# Altium PCB LPCB279R0.PcbDoc (part 2 of 3)
Units mm, origin at the board's own origin, x right, y up, seen from the top; angles counter-clockwise.
Board outline 96 x 109 mm, 2 copper layers (Top Layer, Bottom Layer); 115 components, 90 nets, 384 pads, 812 vias.
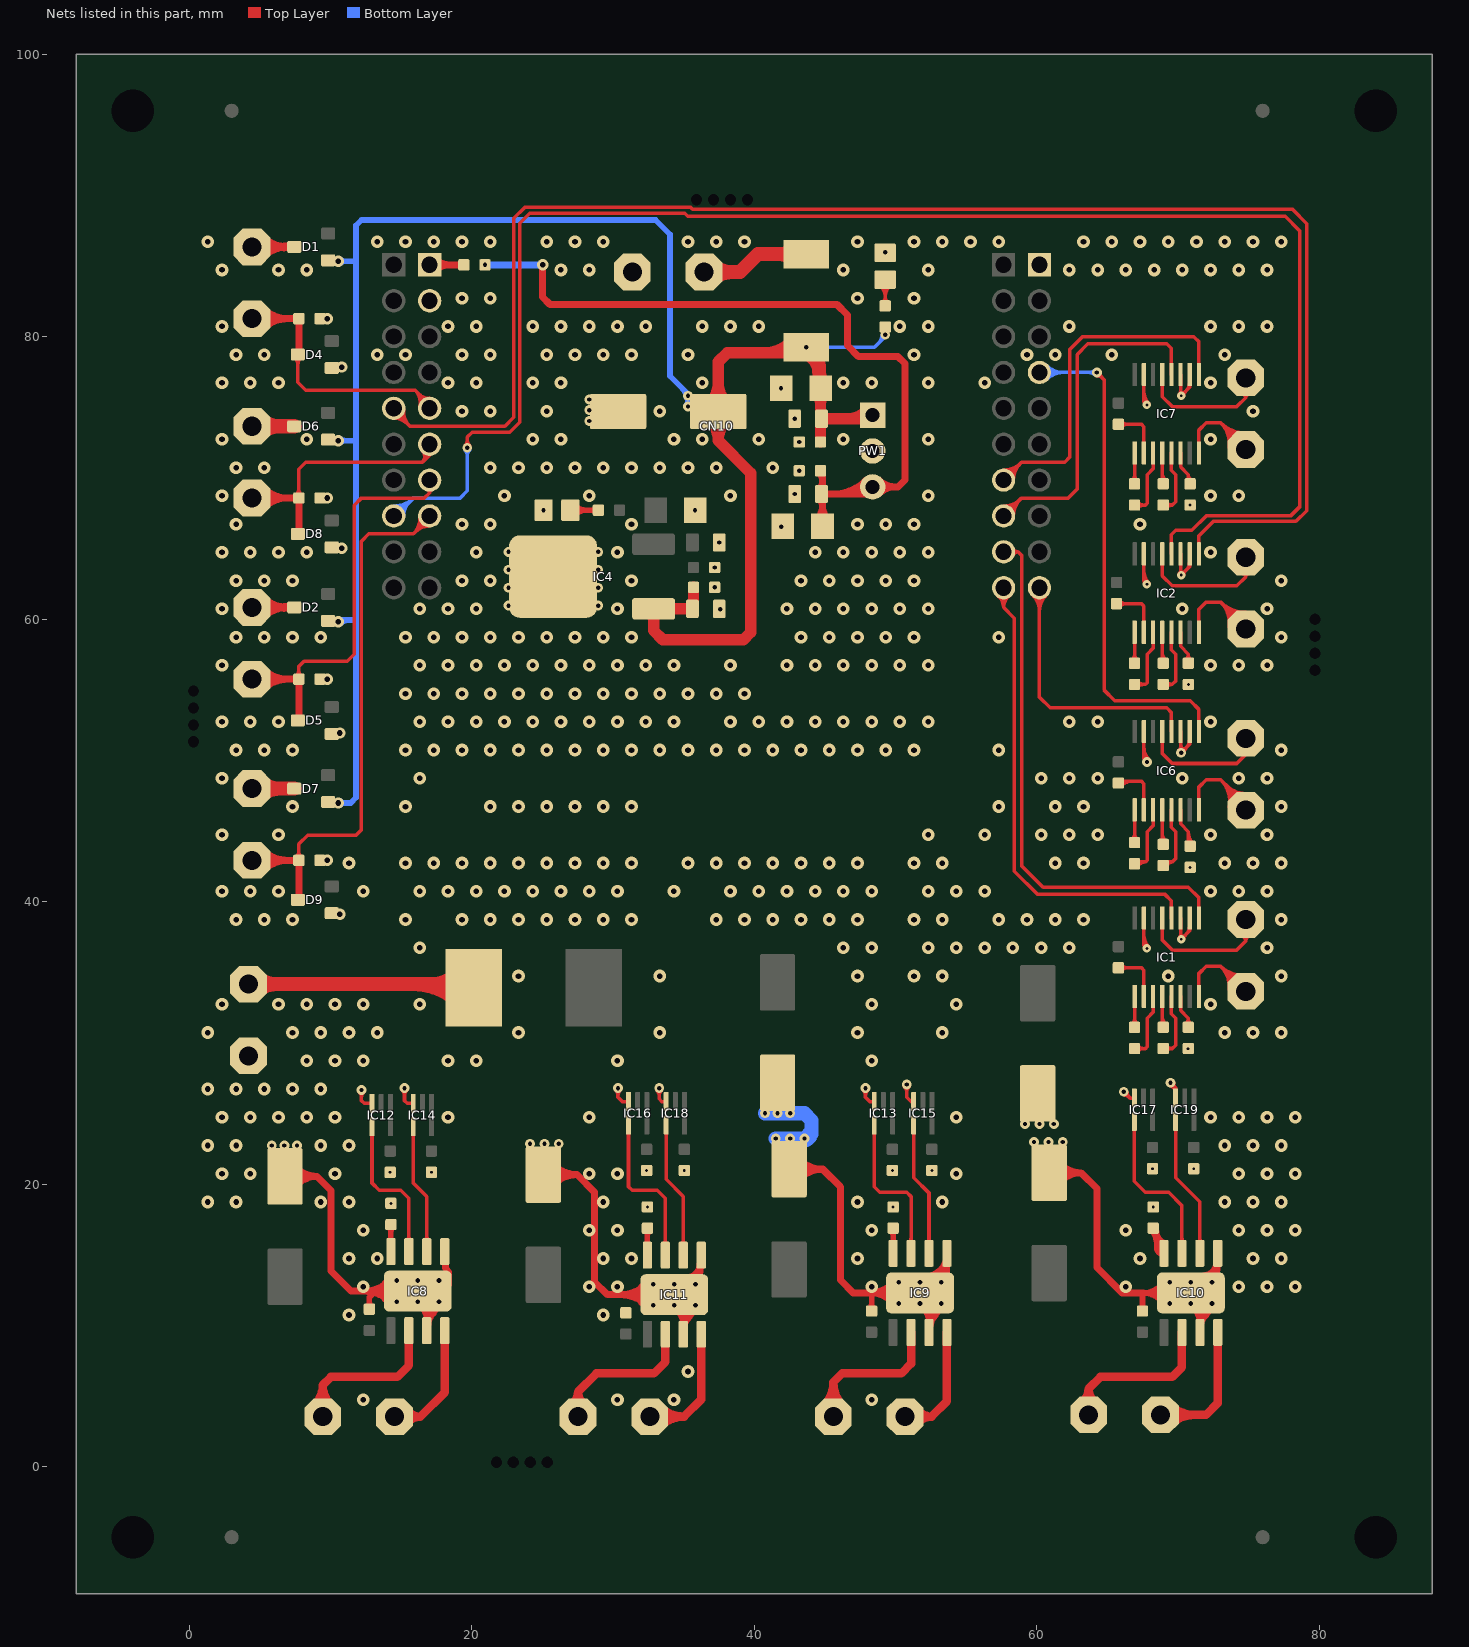
[diagram p2: the nets of this part, all layers, seen from the top]

## Via types
v1: diameter 0.9, hole 0.4, Top Layer to Bottom Layer, tented both sides, 631 vias
v2: diameter 0.7, hole 0.3, Top Layer to Bottom Layer, tented both sides, 111 vias
v3: diameter 0.6, hole 0.2, Top Layer to Bottom Layer, tented both sides, 33 vias
v4: diameter 0.7, hole 0.33, Top Layer to Bottom Layer, tented bottom, 24 vias
v5: diameter 0.8, hole 0.4, Top Layer to Bottom Layer, tented both sides, 13 vias

## Nets (pads, with @x,y where several pads share a name; then routed paths per layer and width w, separated by ;. In a path a pad name is that pad's centre, name@x,y a point inside that pad or via, vN(x,y) a via of type N, cw(c..) or ccw(c..) an arc to the next point about the centre after c; other vN are vias at no path point) (continued)
DGND: C6.2 C7.2 C8.2 C9.2 C10.2 C11.2 C12.2 C13.2 C14.2 C15.2 C16.2 C18.2 C19.2 C26.2 C27.2 C28.2 C29.2 C30.2 C31.2 C32.2 C33.2 C34.2 C35.2 C36.2 C37.2 C38.2 C39.2 CE1.2 CE2.2 CE3.2 CE4.2 CE5.2 CE6.2 CE7.2 CN3.2 CN10.J2_1 CN10.J3_2 CN15.2 D4.1 D5.1 D8.1 D9.1 IC1.10 IC1.11 IC1.15 IC2.10 IC2.11 IC2.15 IC3.K IC4.4 IC5.K IC6.10 IC6.11 IC6.15 IC7.10 IC7.11 IC7.15 IC8.1 IC8.7 IC8.PAD IC9.1 IC9.7 IC9.PAD IC10.1 IC10.7 IC10.PAD IC11.1 IC11.7 IC11.PAD IC12.3 IC13.3 IC14.3 IC15.3 IC16.3 IC17.3 IC18.3 IC19.3 PW1.2 R1.1 R2.1 R3.1 R4.1 R8.1 R9.1 R10.1 R11.1 | length 290.6
  Top Layer w0.25: v2@12.033,26.511 cw(c11.649,26.127) 12.192,26.127 cw(c12.735,26.127) v2@12.351,26.511 ; v2(12.192,26.67) 12.192,25.908 12.383,25.717 IC12.3@12.939,25.717 ; v2@15.081,26.638 cw(c14.697,26.254) 15.24,26.254 cw(c15.783,26.254) v2@15.399,26.638 ; v2(15.24,26.797) 15.24,25.908 15.431,25.717 IC14.3@15.86,25.717 ; v2@30.194,26.638 cw(c29.81,26.254) 30.353,26.254 cw(c30.896,26.254) v2@30.512,26.638 ; v2(30.353,26.797) 30.353,26.162 30.671,25.844 IC16.3@31.1,25.844 ; v2@33.115,26.638 cw(c32.731,26.254) 33.274,26.254 cw(c33.817,26.254) v2@33.433,26.638 ; v2(33.274,26.797) 33.274,26.035 33.465,25.844 IC18.3@33.767,25.844 ; v2@47.72,26.638 cw(c47.336,26.254) 47.879,26.254 cw(c48.422,26.254) v2@48.038,26.638 ; v2(47.879,26.797) 47.879,26.162 48.197,25.844 IC13.3@48.499,25.844 ; v2@50.641,26.892 cw(c50.257,26.508) 50.8,26.508 cw(c51.343,26.508) v2@50.959,26.892 ; v2(50.8,27.051) 50.8,26.162 51.118,25.844 IC15.3@51.293,25.844 ; v2@66.167,26.318 cw(c66.167,25.775) 66.551,26.159 cw(c66.935,26.543) v2@66.392,26.543 ; v2(66.167,26.543) 66.612,26.098 IC17.3@66.914,26.098 ; 67.59,37.021 ccw(c68.136,37.021) v3@67.75,36.635 ; 67.59,37.625 ccw(c68.74,37.625) v3@67.927,36.812 ; IC1.15@67.59,38.843 67.59,36.931 ; 67.59,50.35 ccw(c68.257,50.35) v2@67.785,49.878 ; 67.59,50.953 ccw(c68.86,50.953) v2@67.962,50.055 ; IC6.15@67.59,52.051 67.59,50.139 v2@67.818,49.911 ; 67.59,62.802 ccw(c68.136,62.802) v3@67.75,62.416 ; 67.59,63.406 ccw(c68.74,63.406) v3@67.927,62.593 ; IC2.15@67.59,64.624 67.59,62.712 ; 67.59,75.502 ccw(c68.136,75.502) v3@67.75,75.116 ; 67.59,76.106 ccw(c68.74,76.106) v3@67.927,75.293 ; IC7.15@67.59,77.324 67.59,75.412 ; v3@67.636,36.741 ccw(c67.457,36.798) 67.59,36.931 ; v3@67.636,62.522 ccw(c67.457,62.579) 67.59,62.712 ; v3@67.636,75.222 ccw(c67.457,75.279) 67.59,75.412 ; v3@67.785,36.862 cw(c67.76,37.101) 67.59,36.931 ; v3@67.785,62.643 cw(c67.76,62.882) 67.59,62.712 ; v3@67.785,75.343 cw(c67.76,75.582) 67.59,75.412 ; v3@67.818,36.703 67.59,36.931 ; v3@67.818,62.484 67.59,62.712 ; v3@67.818,75.184 67.59,75.412 ; v2@69.446,26.954 cw(c69.401,26.522) IC19.3@69.777,26.739 ; v2(69.469,27.178) 69.835,26.812 ; v2@69.477,26.953 cw(c69.494,26.471) 69.835,26.812 ; v2@69.598,27.049 cw(c69.148,26.598) IC19.3@69.785,26.598 ; v2@69.686,27.12 ccw(c70.055,27.021) 69.724,26.83 ; v2@69.694,27.17 ccw(c70.176,27.153) 69.835,26.812 ; IC19.3@69.835,26.098 69.835,26.812 ; v2@70.072,50.705 ccw(c69.787,50.99) 70.19,50.99 ; v3@70.107,37.462 ccw(c69.907,37.662) 70.19,37.662 ; v3@70.107,63.243 ccw(c69.907,63.443) 70.19,63.443 ; v3@70.107,75.943 ccw(c69.907,76.143) 70.19,76.143 ; 70.19,37.859 ccw(c70.752,37.859) v3@70.355,37.462 ; IC1.11@70.19,38.843 v3@70.19,37.379 ; v2@70.19,50.587 IC6.11@70.19,52.051 ; 70.19,51.188 ccw(c70.873,51.188) v2@70.39,50.705 ; v3@70.19,63.16 IC2.11@70.19,64.624 ; 70.19,63.64 ccw(c70.752,63.64) v3@70.355,63.243 ; v3@70.19,75.86 IC7.11@70.19,77.324 ; 70.19,76.34 ccw(c70.752,76.34) v3@70.355,75.943 ; v3(70.231,37.338) v3@70.19,37.379 ; v3@70.231,37.513 ccw(c70.231,37.935) 70.53,37.637 ccw(c70.828,37.338) v3@70.406,37.338 ; v2@70.231,50.771 ccw(c70.231,51.314) 70.615,50.93 ccw(c70.999,50.546) v2@70.456,50.546 ; v3@70.231,63.294 ccw(c70.231,63.716) 70.53,63.418 ccw(c70.828,63.119) v3@70.406,63.119 ; v3@70.231,75.994 ccw(c70.231,76.416) 70.53,76.118 ccw(c70.828,75.819) v3@70.406,75.819 ; v2@70.272,50.587 70.84,51.155 IC6.10@70.84,52.051 ; v3@70.272,63.16 70.84,63.728 IC2.10@70.84,64.624 ; v3@70.272,75.86 70.84,76.428 IC7.10@70.84,77.324 ; 70.641,37.748 ccw(c70.221,38.168) IC1.10@70.815,38.168 ; 70.641,50.956 ccw(c70.221,51.376) IC6.10@70.815,51.376 ; 70.641,63.529 ccw(c70.221,63.949) IC2.10@70.815,63.949 ; 70.641,76.229 ccw(c70.221,76.649) IC7.10@70.815,76.649 ; IC1.10@70.84,38.843 70.84,37.947 70.272,37.379 v3@70.19,37.379
  Top Layer w0.4: C28.2@12.612,11.286 ccw(c12.27,11.628) 12.753,11.628 ccw(c13.236,11.628) C28.2@12.894,11.286 ; C28.2@12.753,11.145 12.753,11.991 13.149,12.387 ; IC8.PAD@14.113,12.984 cw(c13.149,13.464) 13.149,12.387 ; IC8.PAD@14.146,11.808 ccw(c13.149,11.239) 13.149,12.387 ; IC8.PAD@16.179,11.927 cw(c16.185,11.428) IC8.PAD@16.617,11.678 ; IC8.PAD@16.222,12.467 16.476,12.467 16.892,12.883 IC8.PAD@16.892,13.391 ; IC8.PAD@16.248,11.543 cw(c14.694,9.989) IC8.7@16.892,9.989 ; IC8.PAD@16.327,11.638 ccw(c16.709,11.536) IC8.PAD@16.366,11.338 ; IC8.PAD@16.531,11.826 cw(c15.659,10.954) 16.892,10.954 ; IC8.7@16.729,10.34 ccw(c16.334,10.735) 16.892,10.735 ; IC8.7@16.817,9.627 16.892,9.702 16.892,11.971 16.476,12.387 IC8.PAD@16.222,12.387 ; IC8.7@16.892,9.692 cw(c18.898,9.692) IC8.PAD@17.81,11.377 ; IC8.7@16.892,10.426 cw(c18.424,10.426) IC8.PAD@17.593,11.713 ; 17.179,10.679 ccw(c16.16,11.601) IC8.PAD@17.532,11.67 ; IC8.PAD@17.226,11.308 cw(c17.723,10.858) IC8.PAD@17.689,11.527 ; IC8.1@18.087,15.227 18.087,14.081 IC8.PAD@18.392,13.776 ; IC8.1@18.206,14.563 ccw(c18.936,14.32) IC8.PAD@18.392,13.776 ; IC11.PAD@34.343,12.673 ccw(c34.343,13.88) IC11.PAD@35.197,13.027 ; IC11.PAD@34.343,13.073 ccw(c34.343,15.246) 35.879,13.709 ; IC11.PAD@34.409,11.289 cw(c33.036,9.916) IC11.7@34.978,9.916 ; IC11.PAD@34.488,11.384 ccw(c34.87,11.282) IC11.PAD@34.527,11.084 ; IC11.7@34.978,9.355 cw(c37.047,9.355) IC11.PAD@35.954,11.112 ; IC11.7@34.978,9.373 34.978,11.538 IC11.PAD@34.343,12.173 ; IC11.7@34.978,10.076 cw(c36.599,10.076) IC11.PAD@35.742,11.451 ; IC11.PAD@35.004,12.834 cw(c35.822,12.017) IC11.PAD@35.849,13.173 ; IC11.PAD@35.293,13.423 ccw(c35.293,14.147) 35.805,13.635 ; 35.326,10.441 ccw(c34.33,11.373) IC11.PAD@35.693,11.418 ; IC11.PAD@35.374,11.058 cw(c35.871,10.594) IC11.PAD@35.848,11.273 ; IC11.PAD@35.606,12.844 cw(c36.326,13.083) IC11.PAD@35.789,13.619 ; IC11.PAD@35.84,12.773 ccw(c35.793,10.723) IC11.PAD@34.343,12.173 ; 35.844,13.674 ccw(c35.169,14.348) IC11.1@36.123,14.348 ; IC11.PAD@35.924,12.743 cw(c36.483,13.248) 35.95,13.78 ; IC11.PAD@35.985,12.97 cw(c37.015,13.311) IC11.1@36.248,14.078 ; IC11.PAD@36.221,13.011 cw(c36.796,13.53) IC11.1@36.248,14.078 ; IC11.1@36.248,14.973 IC11.1@36.248,14.078 ; C29.2@48.172,11.159 ccw(c47.83,11.501) 48.313,11.501 ccw(c48.796,11.501) C29.2@48.454,11.159 ; C29.2@48.313,11.018 48.313,12.3 v1@48.313,12.372 ; 49.063,12.372 cw(c49.063,11.14) IC9.PAD@50.086,11.826 ; 49.155,12.372 ccw(c49.155,13.634) IC9.PAD@50.133,12.837 ; IC9.PAD@49.754,11.604 ccw(c48.313,10.637) v1@48.313,12.372 ; IC9.PAD@49.799,12.596 ccw(c49.369,13.191) IC9.PAD@50.094,13.074 ; IC9.PAD@49.823,13.089 cw(c48.313,14.319) v1@48.313,12.372 ; IC9.PAD@49.847,12.036 cw(c49.371,11.491) IC9.PAD@50.092,11.54 ; IC9.PAD@51.739,11.8 cw(c51.745,11.301) IC9.PAD@52.177,11.551 ; IC9.PAD@51.808,11.416 cw(c50.254,9.862) IC9.7@52.452,9.862 ; IC9.PAD@51.887,11.511 ccw(c52.269,11.409) IC9.PAD@51.926,11.211 ; IC9.PAD@52.091,11.699 cw(c51.219,10.827) 52.452,10.827 ; IC9.7@52.289,10.213 ccw(c51.894,10.608) 52.452,10.608 ; IC9.7@52.377,9.5 52.452,9.575 52.452,11.844 52.036,12.26 51.782,12.26 IC9.PAD@51.742,12.3 51.702,12.34 49.948,12.34 49.916,12.372 v1@48.313,12.372 ; IC9.PAD@52.399,13.515 ccw(c52.017,15.1) IC9.1@53.647,15.1 IC9.PAD@53.647,13.634 ; IC9.7@52.452,9.565 cw(c54.458,9.565) IC9.PAD@53.37,11.25 ; IC9.7@52.452,10.299 cw(c53.984,10.299) IC9.PAD@53.153,11.586 ; IC9.PAD@52.493,13.126 ccw(c52.139,14.592) IC9.1@53.647,14.592 ; IC9.PAD@52.587,12.737 ccw(c52.262,14.084) 53.647,14.084 ; IC9.PAD@52.643,12.321 ccw(c51.962,13.24) IC9.PAD@53.094,13.072 ; IC9.PAD@52.68,12.349 ccw(c52.384,13.576) IC9.PAD@53.647,13.576 ; 52.739,10.552 ccw(c51.72,11.474) IC9.PAD@53.092,11.543 ; IC9.PAD@52.786,11.181 cw(c53.283,10.731) IC9.PAD@53.249,11.4 ; IC9.PAD@52.82,12.865 cw(c53.059,12.428) IC9.PAD@53.2,12.906 ; IC9.PAD@53.002,12.98 cw(c53.62,13.16) IC9.PAD@53.066,13.487 ; IC9.PAD@53.381,13.106 cw(c53.824,13.284) IC9.PAD@53.385,13.471 ; IC9.PAD@53.386,13.092 cw(c54.842,13.514) IC9.1@53.536,14.284 ; C30.2@67.349,11.159 ccw(c67.007,11.501) 67.49,11.501 ccw(c67.973,11.501) C30.2@67.631,11.159 ; C30.2@67.49,11.018 67.49,12.245 67.545,12.3 ; IC10.PAD@68.951,11.575 ccw(c67.545,10.575) 67.545,12.3 ; IC10.PAD@68.951,13.025 cw(c67.545,14.025) 67.545,12.3 ; IC10.PAD@69.008,12.029 cw(c68.544,11.467) IC10.PAD@69.27,11.536 ; IC10.PAD@69.008,12.571 ccw(c68.544,13.133) IC10.PAD@69.27,13.064 ; IC10.PAD@69.276,11.807 ccw(c68.321,11.127) 68.321,12.3 ccw(c68.321,13.473) IC10.PAD@69.276,12.793 ; IC10.PAD@70.985,11.416 cw(c69.612,10.043) IC10.7@71.554,10.043 ; IC10.PAD@71.064,11.511 ccw(c71.446,11.409) IC10.PAD@71.103,11.211 ; IC10.PAD@71.157,12.377 cw(c72.419,11.116) IC10.PAD@72.419,12.9 ; IC10.7@71.554,9.482 cw(c73.623,9.482) IC10.PAD@72.53,11.239 ; IC10.7@71.554,9.5 71.554,11.665 IC10.PAD@70.919,12.3 ; IC10.7@71.554,10.203 cw(c73.175,10.203) IC10.PAD@72.318,11.578 ; IC10.PAD@71.821,13.549 ccw(c71.786,14.472) 72.585,14.01 ccw(c73.133,13.694) IC10.PAD@72.708,13.226 ; IC10.PAD@71.84,13.06 cw(c72.419,12.482) IC10.PAD@72.419,13.3 ; IC10.PAD@71.869,13.55 ccw(c71.869,14.663) 72.656,13.876 ; 71.902,10.568 ccw(c70.906,11.5) IC10.PAD@72.269,11.545 ; IC10.PAD@71.95,11.185 cw(c72.447,10.721) IC10.PAD@72.424,11.4 ; IC10.PAD@72.177,12.987 cw(c72.745,13.135) IC10.PAD@72.33,13.55 ; IC10.PAD@72.306,13.526 ccw(c71.357,14.475) IC10.1@72.699,14.475 ; IC10.PAD@72.502,12.868 cw(c72.977,13.294) IC10.PAD@72.525,13.745 ; IC10.PAD@72.564,13.088 cw(c73.529,13.339) 72.824,14.044 ; IC10.PAD@72.799,13.135 cw(c73.292,13.576) 72.824,14.044 ; IC10.1@72.824,15.1 72.824,14.044 ; 13.149,12.387 IC8.PAD@16.222,12.387 ; IC8.PAD@16.222,12.387 IC8.PAD@16.182,12.427 17.936,12.427 18.392,12.883 IC8.PAD@18.392,13.776 ; IC11.PAD@34.343,12.173 IC11.1@36.248,14.078 ; 67.545,12.3 IC10.PAD@70.919,12.3 ; IC10.PAD@70.919,12.3 71.08,12.3 72.824,14.044 ; IC11.PAD@35.753,13.043 ccw(c35.037,13.99) 36.213,13.827 cw(c35.037,13.99) IC11.PAD@35.753,13.043 ; IC10.PAD@72.331,13.172 ccw(c71.638,14.133) 72.808,13.944 cw(c71.638,14.133) IC10.PAD@72.331,13.172
  Top Layer w0.5: CE2.2@6.784,20.549 9.042,20.549 ; CE2.2@7.525,19.877 cw(c9.042,18.5) 9.042,20.549 ; CE2.2@7.525,21.221 ccw(c9.042,22.598) 9.042,20.549 ; IC8.PAD@13.865,11.878 ccw(c14.386,12.78) IC8.PAD@14.656,11.774 ; IC8.PAD@13.865,12.976 cw(c14.386,12.074) IC8.PAD@14.656,13.08 ; IC8.PAD@14.078,12.313 cw(c13.533,11.369) IC8.PAD@14.585,11.651 ; IC8.PAD@14.078,12.541 ccw(c13.533,13.485) IC8.PAD@14.585,13.203 ; IC8.PAD@14.357,12.427 11.449,12.427 10.033,13.843 10.033,19.558 9.042,20.549 ; IC8.PAD@14.383,11.578 ccw(c12.335,9.53) 12.335,12.427 ccw(c12.335,15.324) IC8.PAD@14.383,13.276 ; IC8.PAD@14.737,11.932 ccw(c13.542,10.737) 13.542,12.427 ccw(c13.542,14.117) IC8.PAD@14.737,12.922 ; CE5.2@25.072,20.676 27.457,20.676 ; CE5.2@25.785,19.975 cw(c27.457,18.332) 27.457,20.676 ; CE5.2@25.785,21.377 ccw(c27.457,23.02) 27.457,20.676 ; IC11.PAD@32.026,11.624 ccw(c32.547,12.526) IC11.PAD@32.817,11.52 ; IC11.PAD@32.026,12.722 cw(c32.547,11.82) IC11.PAD@32.817,12.826 ; IC11.PAD@32.239,12.059 cw(c31.694,11.115) IC11.PAD@32.746,11.397 ; IC11.PAD@32.239,12.287 ccw(c31.694,13.231) IC11.PAD@32.746,12.949 ; IC11.PAD@32.544,11.324 ccw(c30.496,9.276) 30.496,12.173 ccw(c30.496,15.07) IC11.PAD@32.544,13.022 ; IC11.PAD@32.898,11.678 ccw(c31.703,10.483) 31.703,12.173 ccw(c31.703,13.863) IC11.PAD@32.898,12.668 ; IC11.PAD@34.343,12.173 29.61,12.173 28.702,13.081 28.702,19.431 27.457,20.676 ; CE3.2@42.471,21.057 44.856,21.057 ; CE3.2@43.184,20.356 cw(c44.856,18.713) 44.856,21.057 ; CE3.2@43.184,21.758 ccw(c44.856,23.401) 44.856,21.057 ; IC9.PAD@49.851,11.556 ccw(c48.313,10.34) v1@48.313,12.3 ; IC9.PAD@49.851,13.044 cw(c48.313,14.26) v1@48.313,12.3 ; IC9.PAD@49.917,12.3 v1@48.313,12.3 ; CE4.2@60.886,20.803 63.144,20.803 ; CE4.2@61.627,20.131 cw(c63.144,18.754) 63.144,20.803 ; CE4.2@61.627,21.475 ccw(c63.144,22.852) 63.144,20.803 ; 67.545,12.3 66.059,12.3 64.262,14.097 64.262,19.685 63.144,20.803 ; 44.856,21.057 46.101,19.812 46.101,13.208 47.009,12.3 v1@48.313,12.3
  Bottom Layer w1: v2(40.767,25.019) v2(41.656,25.019) v2(42.545,25.019) 43.561,25.019 44.069,24.511 44.069,23.749 ; v2(41.529,23.241) v2(42.545,23.241) v2(43.561,23.241) 44.069,23.749 ; v2@43.611,23.1 ccw(c43.38,23.749) 44.069,23.749 ; v2@43.667,23.135 ccw(c42.697,24.105) 44.069,24.105
  other v1: 12.315,4.732 30.315,4.732 34.315,4.732 48.315,4.732 35.315,6.732 11.315,10.732 29.315,10.732 12.315,12.732 28.315,12.732 30.315,12.732 48.315,12.732 66.315,12.732 74.315,12.732 76.315,12.732 78.315,12.732 11.315,14.732 13.315,14.732 29.315,14.732 31.315,14.732 47.315,14.732 67.315,14.732 75.315,14.732 77.315,14.732 12.315,16.732 28.315,16.732 30.315,16.732 48.315,16.732 66.315,16.732 74.315,16.732 76.315,16.732 78.315,16.732 1.315,18.732 3.315,18.732 9.315,18.732 11.315,18.732 29.315,18.732 47.315,18.732 53.315,18.732 73.315,18.732 75.315,18.732 77.315,18.732 2.315,20.732 4.315,20.732 10.315,20.732 28.315,20.732 30.315,20.732 54.315,20.732 74.315,20.732 76.315,20.732 78.315,20.732 1.315,22.732 3.315,22.732 9.315,22.732 11.315,22.732 73.315,22.732 75.315,22.732 77.315,22.732 2.315,24.732 4.315,24.732 6.315,24.732 8.315,24.732 10.315,24.732 18.315,24.732 28.315,24.732 54.315,24.732 72.315,24.732 74.315,24.732 76.315,24.732 78.315,24.732 1.315,26.732 3.315,26.732 5.315,26.732 7.315,26.732 9.315,26.732 8.315,28.732 10.315,28.732 12.315,28.732 18.315,28.732 20.315,28.732 30.315,28.732 48.315,28.732 1.315,30.732 7.315,30.732 9.315,30.732 11.315,30.732 13.315,30.732 23.315,30.732 33.315,30.732 47.315,30.732 53.315,30.732 73.315,30.732 75.315,30.732 77.315,30.732 2.315,32.732 6.315,32.732 8.315,32.732 10.315,32.732 12.315,32.732 16.315,32.732 48.315,32.732 54.315,32.732 72.315,32.732 23.315,34.732 33.315,34.732 47.315,34.732 51.315,34.732 53.315,34.732 69.315,34.732 77.315,34.732 16.315,36.732 46.315,36.732 48.315,36.732 52.315,36.732 54.315,36.732 56.315,36.732 58.315,36.732 60.315,36.732 62.315,36.732 76.315,36.732 3.315,38.732 5.315,38.732 7.315,38.732 15.315,38.732 19.315,38.732 21.315,38.732 23.315,38.732 25.315,38.732 27.315,38.732 29.315,38.732 31.315,38.732 37.315,38.732 39.315,38.732 41.315,38.732 43.315,38.732 45.315,38.732 47.315,38.732 51.315,38.732 53.315,38.732 57.315,38.732 59.315,38.732 61.315,38.732 63.315,38.732 77.315,38.732 2.315,40.732 4.315,40.732 6.315,40.732 12.315,40.732 16.315,40.732 18.315,40.732 20.315,40.732 22.315,40.732 24.315,40.732 26.315,40.732 28.315,40.732 30.315,40.732 34.315,40.732 38.315,40.732 40.315,40.732 42.315,40.732 44.315,40.732 46.315,40.732 48.315,40.732 52.315,40.732 54.315,40.732 56.315,40.732 72.315,40.732 74.315,40.732 76.315,40.732 11.315,42.732 15.315,42.732 17.315,42.732 19.315,42.732 21.315,42.732 23.315,42.732 25.315,42.732 27.315,42.732 29.315,42.732 31.315,42.732 35.315,42.732 37.315,42.732 39.315,42.732 41.315,42.732 43.315,42.732 45.315,42.732 47.315,42.732 51.315,42.732 53.315,42.732 61.315,42.732 63.315,42.732 73.315,42.732 75.315,42.732 77.315,42.732 2.315,44.732 6.315,44.732 52.315,44.732 56.315,44.732 60.315,44.732 62.315,44.732 64.315,44.732 72.315,44.732 76.315,44.732 7.315,46.732 15.315,46.732 21.315,46.732 23.315,46.732 25.315,46.732 27.315,46.732 29.315,46.732 31.315,46.732 57.315,46.732 61.315,46.732 63.315,46.732 77.315,46.732 2.315,48.732 16.315,48.732 60.315,48.732 62.315,48.732 64.315,48.732 70.315,48.732 74.315,48.732 76.315,48.732 3.315,50.732 5.315,50.732 7.315,50.732 15.315,50.732 17.315,50.732 19.315,50.732 21.315,50.732 23.315,50.732 25.315,50.732 27.315,50.732 29.315,50.732 31.315,50.732 33.315,50.732 35.315,50.732 37.315,50.732 39.315,50.732 41.315,50.732 43.315,50.732 45.315,50.732 47.315,50.732 49.315,50.732 51.315,50.732 57.315,50.732 77.315,50.732 2.315,52.732 4.315,52.732 6.315,52.732 16.315,52.732 18.315,52.732 20.315,52.732 22.315,52.732 24.315,52.732 26.315,52.732 28.315,52.732 30.315,52.732 32.315,52.732 34.315,52.732 38.315,52.732 40.315,52.732 42.315,52.732 44.315,52.732 46.315,52.732 48.315,52.732 50.315,52.732 52.315,52.732 62.315,52.732 64.315,52.732 72.315,52.732 15.315,54.732 17.315,54.732 19.315,54.732 21.315,54.732 23.315,54.732 25.315,54.732 27.315,54.732 29.315,54.732 31.315,54.732 33.315,54.732 35.315,54.732 37.315,54.732 39.315,54.732 2.315,56.732 16.315,56.732 18.315,56.732 20.315,56.732 22.315,56.732 24.315,56.732 26.315,56.732 28.315,56.732 30.315,56.732 32.315,56.732 34.315,56.732 38.315,56.732 42.315,56.732 44.315,56.732 46.315,56.732 48.315,56.732 50.315,56.732 52.315,56.732 72.315,56.732 74.315,56.732 76.315,56.732 3.315,58.732 5.315,58.732 7.315,58.732 9.315,58.732 15.315,58.732 17.315,58.732 19.315,58.732 21.315,58.732 23.315,58.732 25.315,58.732 27.315,58.732 29.315,58.732 31.315,58.732 43.315,58.732 45.315,58.732 47.315,58.732 49.315,58.732 51.315,58.732 57.315,58.732 77.315,58.732 2.315,60.732 16.315,60.732 18.315,60.732 20.315,60.732 30.315,60.732 42.315,60.732 44.315,60.732 46.315,60.732 48.315,60.732 50.315,60.732 52.315,60.732 70.315,60.732 76.315,60.732 3.315,62.732 5.315,62.732 7.315,62.732 19.315,62.732 21.315,62.732 31.315,62.732 43.315,62.732 45.315,62.732 47.315,62.732 49.315,62.732 51.315,62.732 77.315,62.732 2.315,64.732 4.315,64.732 6.315,64.732 8.315,64.732 20.315,64.732 30.315,64.732 44.315,64.732 46.315,64.732 48.315,64.732 50.315,64.732 52.315,64.732 72.315,64.732 3.315,66.732 19.315,66.732 21.315,66.732 31.315,66.732 47.315,66.732 49.315,66.732 51.315,66.732 67.315,66.732 2.315,68.732 22.315,68.732 28.315,68.732 38.315,68.732 52.315,68.732 72.315,68.732 74.315,68.732 3.315,70.732 5.315,70.732 21.315,70.732 23.315,70.732 25.315,70.732 27.315,70.732 29.315,70.732 31.315,70.732 33.315,70.732 35.315,70.732 37.315,70.732 41.315,70.732 2.315,72.732 8.315,72.732 24.315,72.732 26.315,72.732 34.315,72.732 36.315,72.732 40.315,72.732 46.315,72.732 52.315,72.732 72.315,72.732 19.315,74.732 21.315,74.732 25.315,74.732 33.315,74.732 75.315,74.732 2.315,76.732 4.315,76.732 6.315,76.732 18.315,76.732 20.315,76.732 24.315,76.732 26.315,76.732 36.315,76.732 46.315,76.732 48.315,76.732 52.315,76.732 56.315,76.732 72.315,76.732 3.315,78.732 5.315,78.732 13.315,78.732 15.315,78.732 19.315,78.732 21.315,78.732 25.315,78.732 27.315,78.732 29.315,78.732 31.315,78.732 35.315,78.732 51.315,78.732 59.315,78.732 61.315,78.732 65.315,78.732 73.315,78.732 2.315,80.732 18.315,80.732 20.315,80.732 24.315,80.732 26.315,80.732 28.315,80.732 30.315,80.732 32.315,80.732 36.315,80.732 38.315,80.732 40.315,80.732 50.315,80.732 52.315,80.732 62.315,80.732 72.315,80.732 74.315,80.732 76.315,80.732 19.315,82.732 21.315,82.732 47.315,82.732 51.315,82.732 2.315,84.732 6.315,84.732 8.315,84.732 26.315,84.732 28.315,84.732 46.315,84.732 52.315,84.732 62.315,84.732 64.315,84.732 66.315,84.732 68.315,84.732 70.315,84.732 72.315,84.732 74.315,84.732 76.315,84.732 1.315,86.732 13.315,86.732 15.315,86.732 17.315,86.732 19.315,86.732 21.315,86.732 25.315,86.732 27.315,86.732 29.315,86.732 35.315,86.732 37.315,86.732 39.315,86.732 47.315,86.732 51.315,86.732 53.315,86.732 55.315,86.732 57.315,86.732 63.315,86.732 65.315,86.732 67.315,86.732 69.315,86.732 71.315,86.732 73.315,86.732 75.315,86.732 77.315,86.732
  other v2: 5.842,22.733 6.731,22.733 7.62,22.733 24.13,22.86 25.146,22.86 26.162,22.86 59.817,22.987 60.833,22.987 61.849,22.987 59.182,24.257 60.198,24.257 61.214,24.257 67.803,49.896 70.231,50.546 37.592,60.706 22.606,60.96 28.956,60.96 22.606,62.23 28.956,62.23 37.199,62.258 22.606,63.5 28.956,63.5 37.199,63.655 22.606,64.77 28.956,64.77 37.526,65.433 41.91,66.548 25.085,67.719 35.817,67.719 42.865,68.862 43.192,70.513 43.192,72.545 28.321,74.041 42.865,74.196 28.321,74.803 28.321,75.565 41.907,76.355 49.276,85.979
  other v3: 32.438,18.384 49.837,18.384 68.252,18.384 14.277,18.638 14.224,20.84 17.145,20.84 32.385,20.967 35.052,20.967 49.784,20.967 52.578,20.967 68.199,21.094 71.12,21.094 70.724,29.588 67.803,36.688 70.851,42.415 70.739,55.384 67.803,62.469 70.231,63.119 70.866,68.084 67.803,75.169 70.231,75.819
  other v4: 32.843,11.423 34.343,11.423 35.843,11.423 50.242,11.55 51.742,11.55 53.242,11.55 69.419,11.55 70.919,11.55 72.419,11.55 14.682,11.677 16.182,11.677 17.682,11.677 32.843,12.923 34.343,12.923 35.843,12.923 50.242,13.05 51.742,13.05 53.242,13.05 69.419,13.05 70.919,13.05 72.419,13.05 14.682,13.177 16.182,13.177 17.682,13.177
  other v5: 10.668,39.116 9.779,42.926 10.668,51.943 9.779,55.753 10.795,65.024 9.779,68.58 10.795,77.851 9.779,81.28
NetC1_2: C1.2 IC1.2 | length 4.8
  Top Layer w0.25: C1.2@65.786,35.318 67.425,35.318 67.59,35.153 IC1.2@67.59,33.293 ; C1.2@65.98,35.124 cw(c66.45,34.654) 66.45,35.318 cw(c66.45,35.982) C1.2@65.98,35.512
NetC2_2: C2.2 IC2.2 | length 4.8
  Top Layer w0.25: C2.2@65.786,61.099 67.425,61.099 67.59,60.934 IC2.2@67.59,59.074 ; C2.2@65.853,60.905 cw(c66.323,60.435) 66.323,61.099 cw(c66.323,61.763) C2.2@65.853,61.293
NetC3_1: C3.1 IC1.1 | length 3.2
  Top Layer w0.25: C3.1@66.735,31.297 ccw(c66.239,31.793) 66.94,31.793 ; C3.1@66.929,31.103 66.94,31.114 IC1.1@66.94,33.293 ; 66.94,31.74 ccw(c67.566,31.74) C3.1@67.123,31.297
NetC3_2: C3.2 IC1.3 | length 5.7
  Top Layer w0.25: C3.2@66.929,29.603 67.703,29.603 67.818,29.718 67.818,31.75 68.24,32.172 IC1.3@68.24,33.293 ; C3.2@67.123,29.409 cw(c67.593,28.939) 67.593,29.603 cw(c67.593,30.267) C3.2@67.123,29.797
NetC4_1: C4.1 IC1.4 | length 3.3
  Top Layer w0.25: C4.1@68.767,31.297 ccw(c68.468,31.596) 68.89,31.596 ; 68.89,31.938 ccw(c69.796,31.938) C4.1@69.155,31.297 ; IC1.4@68.89,33.293 68.89,31.174 C4.1@68.961,31.103
NetC4_2: C4.2 IC1.5 | length 5.6
  Top Layer w0.25: C4.2@68.961,29.603 69.608,29.603 ; C4.2@69.159,29.412 cw(c69.608,28.979) 69.608,29.603 ; C4.2@69.159,29.794 ccw(c69.608,30.227) 69.608,29.603 ; IC1.5@69.54,33.293 69.54,32.06 69.85,31.75 69.85,29.845 69.608,29.603
NetC5_1: C5.1 IC2.1 | length 3.2
  Top Layer w0.25: C5.1@66.735,57.078 ccw(c66.239,57.574) 66.94,57.574 ; C5.1@66.94,56.895 IC2.1@66.94,59.074 ; 66.94,57.521 ccw(c67.566,57.521) C5.1@67.123,57.078
NetC5_2: C5.2 IC2.3 | length 5.7
  Top Layer w0.25: C5.2@66.929,55.384 67.703,55.384 67.818,55.499 67.818,57.531 68.24,57.953 IC2.3@68.24,59.074 ; C5.2@67.123,55.19 cw(c67.593,54.72) 67.593,55.384 cw(c67.593,56.048) C5.2@67.123,55.578
NetC17_1: C17.1 IC2.4 | length 3.3
  Top Layer w0.25: C17.1@68.767,57.078 ccw(c68.468,57.377) 68.89,57.377 ; 68.89,57.719 ccw(c69.796,57.719) C17.1@69.155,57.078 ; IC2.4@68.89,59.074 68.89,56.955 C17.1@68.961,56.884
NetC17_2: C17.2 IC2.5 | length 5.6
  Top Layer w0.25: C17.2@68.961,55.384 69.608,55.384 ; C17.2@69.159,55.193 cw(c69.608,54.76) 69.608,55.384 ; C17.2@69.159,55.575 ccw(c69.608,56.008) 69.608,55.384 ; IC2.5@69.54,59.074 69.54,57.841 69.85,57.531 69.85,55.626 69.608,55.384
NetC18_1: C18.1 IC1.6 | length 3.4
  Top Layer w0.25: IC1.6@70.19,33.293 70.19,32.299 70.739,31.75 ; C18.1@70.548,31.301 ccw(c70.115,31.75) 70.739,31.75 ; C18.1@70.739,31.103 70.739,31.75 ; C18.1@70.93,31.301 cw(c71.363,31.75) 70.739,31.75
NetC19_1: C19.1 IC2.6 | length 3.4
  Top Layer w0.25: IC2.6@70.19,59.074 70.19,58.08 70.739,57.531 ; C19.1@70.548,57.082 ccw(c70.115,57.531) 70.739,57.531 ; C19.1@70.739,56.884 70.739,57.531 ; C19.1@70.93,57.082 cw(c71.363,57.531) 70.739,57.531
NetC20_2: C20.2 IC6.2 | length 4.6
  Top Layer w0.25: C20.2@65.786,48.526 67.425,48.526 67.59,48.361 IC6.2@67.59,46.501 ; C20.2@65.98,48.205 cw(c66.757,47.428) 66.757,48.526
NetC21_2: C21.2 IC7.2 | length 4.8
  Top Layer w0.25: C21.2@65.786,73.799 67.425,73.799 67.59,73.634 IC7.2@67.59,71.774 ; C21.2@65.98,73.605 cw(c66.45,73.135) 66.45,73.799 cw(c66.45,74.463) C21.2@65.98,73.993
NetC22_1: C22.1 IC6.1 | length 3.2
  Top Layer w0.25: C22.1@66.735,44.378 ccw(c66.239,44.874) 66.94,44.874 ; C22.1@66.94,44.322 IC6.1@66.94,46.501 ; 66.94,44.821 ccw(c67.566,44.821) C22.1@67.123,44.378
NetC22_2: C22.2 IC6.3 | length 5.3
  Top Layer w0.25: C22.2@66.929,42.811 67.703,42.811 ; C22.2@67.154,42.526 cw(c67.703,42.14) 67.703,42.811 ; IC6.3@68.24,46.501 68.24,45.38 67.818,44.958 67.818,42.926 67.703,42.811
NetC23_1: C23.1 IC6.4 | length 3.3
  Top Layer w0.25: C23.1@68.767,44.251 ccw(c68.468,44.55) 68.89,44.55 ; 68.89,44.892 ccw(c69.796,44.892) C23.1@69.155,44.251 ; IC6.4@68.89,46.501 68.89,44.382 C23.1@68.961,44.311
NetC23_2: C23.2 IC6.5 | length 5.5
  Top Layer w0.25: C23.2@68.961,42.811 69.608,42.811 ; C23.2@68.986,42.552 cw(c69.302,42.488) C23.2@69.302,42.811 ; C23.2@69.231,42.502 cw(c69.608,42.426) 69.608,42.811 ; IC6.5@69.54,46.501 69.54,45.268 69.85,44.958 69.85,43.053 69.608,42.811
NetC24_1: C24.1 IC7.1 | length 3.2
  Top Layer w0.25: C24.1@66.735,69.778 ccw(c66.239,70.274) 66.94,70.274 ; C24.1@66.94,69.595 IC7.1@66.94,71.774 ; 66.94,70.221 ccw(c67.566,70.221) C24.1@67.123,69.778
NetC24_2: C24.2 IC7.3 | length 5.7
  Top Layer w0.25: C24.2@66.929,68.084 67.703,68.084 67.818,68.199 67.818,70.231 68.24,70.653 IC7.3@68.24,71.774 ; C24.2@67.123,67.89 cw(c67.593,67.42) 67.593,68.084 cw(c67.593,68.748) C24.2@67.123,68.278
NetC25_1: C25.1 IC7.4 | length 3.3
  Top Layer w0.25: C25.1@68.767,69.778 ccw(c68.468,70.077) 68.89,70.077 ; 68.89,70.419 ccw(c69.796,70.419) C25.1@69.155,69.778 ; IC7.4@68.89,71.774 68.89,69.655 C25.1@68.961,69.584
NetC25_2: C25.2 IC7.5 | length 5.6
  Top Layer w0.25: C25.2@68.961,68.084 69.608,68.084 ; C25.2@69.159,67.893 cw(c69.608,67.46) 69.608,68.084 ; C25.2@69.159,68.275 ccw(c69.608,68.708) 69.608,68.084 ; IC7.5@69.54,71.774 69.54,70.541 69.85,70.231 69.85,68.326 69.608,68.084
NetC26_1: C26.1 IC6.6 | length 3.3
  Top Layer w0.25: IC6.6@70.19,46.501 70.19,45.507 70.739,44.958 C26.1@70.739,44.311 ; 70.739,44.901 ccw(c71.837,44.901) C26.1@71.06,44.124
NetC27_1: C27.1 IC7.6 | length 2.9
  Top Layer w0.25: IC7.6@70.19,71.774 70.19,70.78 70.739,70.231 ; C27.1@70.739,69.584 70.739,70.231 ; C27.1@70.988,69.831 cw(c71.186,70.231) 70.739,70.231
NetCN1_1: CN1.1 D1.3 | length 10.3
  Top Layer w0.5: CN1.1@4.445,86.36 D1.3@7.436,86.36 ; CN1.1@4.834,85.971 cw(c5.773,85.032) 5.773,86.36 cw(c5.773,87.688) CN1.1@4.834,86.749 ; CN1.1@5.187,85.618 cw(c6.98,83.825) 6.98,86.36 cw(c6.98,88.895) CN1.1@5.187,87.102 ; 6.697,86.284 cw(c6.894,85.551) D1.3@7.273,86.208 ; 6.697,86.436 ccw(c6.894,87.169) D1.3@7.273,86.512
NetCN1_2: CN1.2 CN10.J3_5 D4.3 R1.2 | length 28.6
  Top Layer w0.25: D4.3@7.478,78.528 cw(c6.966,78.016) 7.69,78.016 cw(c8.414,78.016) D4.3@7.902,78.528 ; D4.3@7.69,78.74 7.69,76.765 8.255,76.2 16.002,76.2 ; 16.257,75.945 ccw(c17.018,76.707) CN10.J3_5@17.018,75.63 ; 16.327,75.875 cw(c15.671,75.219) CN10.J3_5@16.578,75.024 ; CN10.J3_5@16.334,75.077 ccw(c15.136,75.334) 16.002,76.2 ; CN10.J3_5@17.018,74.93 17.018,75.184 16.002,76.2
  Top Layer w0.5: CN1.2@4.445,81.28 R1.2@7.759,81.28 7.759,78.809 D4.3@7.69,78.74 ; CN1.2@4.834,80.891 cw(c5.773,79.952) 5.773,81.28 cw(c5.773,82.608) CN1.2@4.834,81.669 ; CN1.2@5.187,80.538 cw(c6.98,78.745) 6.98,81.28 cw(c6.98,83.815) CN1.2@5.187,82.022 ; 7.759,79.177 ccw(c8.202,79.177) D4.3@7.889,78.864
NetCN2_1: CN2.1 D2.3 | length 10.3
  Top Layer w0.5: CN2.1@4.445,60.833 D2.3@7.436,60.833 ; CN2.1@4.834,60.444 cw(c5.773,59.505) 5.773,60.833 cw(c5.773,62.161) CN2.1@4.834,61.222 ; CN2.1@5.187,60.091 cw(c6.98,58.298) 6.98,60.833 cw(c6.98,63.368) CN2.1@5.187,61.575 ; 6.697,60.757 cw(c6.894,60.024) D2.3@7.273,60.681 ; 6.697,60.909 ccw(c6.894,61.642) D2.3@7.273,60.985
NetCN2_2: CN2.2 CN10.J3_7 D5.3 R2.2 | length 36.6
  Top Layer w0.25: R2.2@7.565,55.947 ccw(c7.095,56.417) 7.759,56.417 ccw(c8.423,56.417) R2.2@7.953,55.947 ; R2.2@7.759,55.753 7.759,56.654 8.128,57.023 11.176,57.023 11.684,57.531 11.684,68.072 12.192,68.58 16.637,68.58 17.018,68.961 ; CN10.J3_7@16.854,69.17 cw(c16.804,68.961) 17.018,68.961 ; CN10.J3_7@17.018,69.85 17.018,68.961 ; CN10.J3_7@17.182,69.17 ccw(c17.232,68.961) 17.018,68.961
  Top Layer w0.5: CN2.2@4.445,55.753 R2.2@7.759,55.753 7.759,52.901 D5.3@7.69,52.832 ; CN2.2@4.834,55.364 cw(c5.773,54.425) 5.773,55.753 cw(c5.773,57.081) CN2.2@4.834,56.142 ; CN2.2@5.187,55.011 cw(c6.98,53.218) 6.98,55.753 cw(c6.98,58.288) CN2.2@5.187,56.495 ; 7.759,53.269 ccw(c8.202,53.269) D5.3@7.889,52.956
NetCN3_1: CN3.1 D3.2 | length 12.8
  Top Layer w1: CN3.1@36.449,84.582 38.989,84.582 40.257,85.85 D3.2@43.688,85.85 ; CN3.1@37.015,84.016 cw(c38.38,82.651) 38.38,84.582 cw(c38.38,86.513) CN3.1@37.015,85.148 ; D3.2@42.739,85.485 ccw(c41.858,84.604) 41.858,85.85 ccw(c41.858,87.096) D3.2@42.739,86.215
NetCN4_1: CN4.1 D6.3 | length 6
  Top Layer w1: CN4.1@4.445,73.66 D6.3@7.436,73.66 ; CN4.1@5.011,73.094 cw(c6.376,71.729) 6.376,73.66 cw(c6.376,75.591) CN4.1@5.011,74.226
NetCN4_2: CN4.2 CN10.J3_6 D8.3 R3.2 | length 28.4
  Top Layer w0.25: R3.2@7.565,68.774 ccw(c7.095,69.244) 7.759,69.244 ccw(c8.423,69.244) R3.2@7.953,68.774 ; R3.2@7.759,68.58 7.759,70.624 8.255,71.12 16.51,71.12 ; CN10.J3_6@16.516,71.902 cw(c16.116,71.514) 16.51,71.12 ; 16.689,71.299 ccw(c16.298,71.691) CN10.J3_6@16.695,72.077 ; 16.869,71.479 ccw(c16.48,71.868) CN10.J3_6@16.875,72.251 ; CN10.J3_6@17.018,72.39 17.018,71.628 16.51,71.12
  Top Layer w0.5: CN4.2@4.445,68.58 R3.2@7.759,68.58 7.759,66.109 D8.3@7.69,66.04 ; CN4.2@4.834,68.191 cw(c5.773,67.252) 5.773,68.58 cw(c5.773,69.908) CN4.2@4.834,68.969 ; CN4.2@5.187,67.838 cw(c6.98,66.045) 6.98,68.58 cw(c6.98,71.115) CN4.2@5.187,69.322 ; 7.759,66.477 ccw(c8.202,66.477) D8.3@7.889,66.164
NetCN5_1: CN5.1 D7.3 | length 6
  Top Layer w1: CN5.1@4.445,48.006 D7.3@7.436,48.006 ; CN5.1@5.011,47.44 cw(c6.376,46.075) 6.376,48.006 cw(c6.376,49.937) CN5.1@5.011,48.572
NetCN5_2: CN5.2 CN10.J3_8 D9.3 R4.2 | length 49.7
  Top Layer w0.25: R4.2@7.565,43.12 ccw(c7.095,43.59) 7.759,43.59 ccw(c8.423,43.59) R4.2@7.953,43.12 ; R4.2@7.759,42.926 7.759,44.081 8.382,44.704 11.811,44.704 12.192,45.085 12.192,65.532 12.7,66.04 15.875,66.04 ; 16.04,66.205 cw(c17.018,65.227) CN10.J3_8@17.018,66.61 ; 16.257,66.422 ccw(c15.494,67.185) CN10.J3_8@16.569,67.273 ; CN10.J3_8@16.32,67.253 cw(c14.788,67.127) 15.875,66.04 ; 16.467,66.632 cw(c17.018,66.08) CN10.J3_8@17.018,66.86 ; CN10.J3_8@17.018,67.31 17.018,67.183 15.875,66.04
  Top Layer w0.5: CN5.2@4.445,42.926 R4.2@7.759,42.926 7.759,40.201 D9.3@7.69,40.132 ; CN5.2@4.834,42.537 cw(c5.773,41.598) 5.773,42.926 cw(c5.773,44.254) CN5.2@4.834,43.315 ; CN5.2@5.187,42.184 cw(c6.98,40.391) 6.98,42.926 cw(c6.98,45.461) CN5.2@5.187,43.668 ; 7.759,40.569 ccw(c8.202,40.569) D9.3@7.889,40.256
NetCN6_1: CN6.1 IC1.8 | length 14.6
  Top Layer w0.25: IC1.8@71.49,33.293 71.49,34.914 72.009,35.433 73.025,35.433 CN6.1@74.803,33.655 ; CN6.1@73.633,33.759 ccw(c71.538,33.946) 73.025,35.433 ccw(c74.512,36.92) CN6.1@74.699,34.825 ; CN6.1@73.882,33.737 ccw(c72.233,33.884) 73.403,35.055 ccw(c74.574,36.225) CN6.1@74.721,34.576 ; CN6.1@74.131,33.715 ccw(c72.927,33.822) 73.782,34.676 ccw(c74.636,35.531) CN6.1@74.743,34.327
NetCN6_2: CN6.2 IC1.13 | length 10.6
  Top Layer w0.25: IC1.13@68.89,38.843 68.89,37.282 69.596,36.576 74.168,36.576 74.803,37.211 ; CN6.2@74.504,37.599 cw(c74.402,37.211) 74.803,37.211 ; CN6.2@74.803,38.735 74.803,37.211 ; CN6.2@75.102,37.599 ccw(c75.204,37.211) 74.803,37.211
NetCN7_1: CN7.1 IC2.8 | length 15.1
  Top Layer w0.25: IC2.8@71.49,59.074 71.49,60.695 72.009,61.214 73.025,61.214 CN7.1@74.803,59.436 ; 73.389,60.85 cw(c72.163,59.624) CN7.1@73.885,59.419 ; 73.449,60.79 ccw(c74.791,62.131) CN7.1@74.799,60.234 ; CN7.1@73.636,59.448 ccw(c71.513,59.702) 73.025,61.214 ccw(c74.787,62.976) CN7.1@74.798,60.484 ; 73.753,60.486 cw(c72.814,59.547) CN7.1@74.133,59.389 ; 73.874,60.365 ccw(c74.795,61.287) CN7.1@74.8,59.984
NetCN7_2: CN7.2 IC2.13 | length 10.2
  Top Layer w0.25: IC2.13@68.89,64.624 68.89,63.063 69.596,62.357 74.168,62.357 74.803,62.992 ; CN7.2@74.602,63.231 cw(c74.56,62.992) 74.803,62.992 ; CN7.2@74.803,64.516 74.803,62.992 ; CN7.2@75.004,63.231 ccw(c75.046,62.992) 74.803,62.992
NetCN8_1: CN8.1 IC6.8 | length 15
  Top Layer w0.25: IC6.8@71.49,46.501 71.49,48.122 72.009,48.641 73.025,48.641 CN8.1@74.803,46.863 ; 73.025,48.641 cw(c71.448,47.064) CN8.1@73.645,46.683 ; 73.366,48.3 cw(c72.029,46.963) CN8.1@73.892,46.64 ; 73.448,48.218 ccw(c74.803,49.574) CN8.1@74.803,47.657 ; 73.706,47.96 cw(c72.61,46.863) CN8.1@74.138,46.597 ; 73.874,47.792 ccw(c74.803,48.72) CN8.1@74.803,47.407 ; CN8.1@74.047,47.619 cw(c73.19,46.762) CN8.1@74.384,46.555
NetCN8_2: CN8.2 IC6.13 | length 9.6
  Top Layer w0.25: IC6.13@68.89,52.051 68.89,50.49 69.596,49.784 74.168,49.784 74.803,50.419 CN8.2@74.803,51.943
NetCN9_1: CN9.1 IC7.8 | length 15.1
  Top Layer w0.25: IC7.8@71.49,71.774 71.49,73.395 72.009,73.914 73.025,73.914 CN9.1@74.803,72.136 ; 73.389,73.55 cw(c72.163,72.324) CN9.1@73.885,72.119 ; 73.449,73.49 ccw(c74.791,74.831) CN9.1@74.799,72.934 ; CN9.1@73.636,72.148 ccw(c71.513,72.402) 73.025,73.914 ccw(c74.787,75.676) CN9.1@74.798,73.184 ; 73.753,73.186 cw(c72.814,72.247) CN9.1@74.133,72.089 ; 73.874,73.065 ccw(c74.795,73.987) CN9.1@74.8,72.684
NetCN9_2: CN9.2 IC7.13 | length 10.2
  Top Layer w0.25: IC7.13@68.89,77.324 68.89,75.763 69.596,75.057 74.168,75.057 74.803,75.692 ; CN9.2@74.602,75.931 cw(c74.56,75.692) 74.803,75.692 ; CN9.2@74.803,77.216 74.803,75.692 ; CN9.2@75.004,75.931 ccw(c75.046,75.692) 74.803,75.692
NetCN10_J3_1: CN10.J3_1 R7.1 | length 4.6
  Top Layer w0.5: CN10.J3_1@17.018,85.09 R7.1@19.443,85.09 ; CN10.J3_1@17.425,84.683 cw(c18.406,83.702) 18.406,85.09 cw(c18.406,86.478) CN10.J3_1@17.425,85.497
NetCN11_1: CN11.1 IC8.6 | length 14.7
  Top Layer w0.6: CN11.1@8.786,4.284 ccw(c7.463,5.768) 9.451,5.768 ; CN11.1@9.451,3.537 9.451,5.768 ; CN11.1@10.116,4.284 cw(c11.439,5.768) 9.451,5.768 ; IC8.6@15.547,9.627 15.547,7.165 14.732,6.35 10.033,6.35 9.451,5.768
NetCN11_2: CN11.2 IC8.8 | length 11
  Top Layer w0.6: CN11.2@14.531,3.537 16.364,3.537 ; CN11.2@15.372,2.996 cw(c16.364,2.357) 16.364,3.537 ; CN11.2@15.372,4.078 ccw(c16.364,4.717) 16.364,3.537 ; IC8.8@18.087,9.627 18.087,5.26 16.364,3.537
NetCN12_1: CN12.1 IC9.6 | length 14.5
  Top Layer w0.6: CN12.1@44.897,4.244 ccw(c43.189,5.951) 45.604,5.951 ccw(c48.018,5.951) CN12.1@46.311,4.244 ; CN12.1@45.604,3.537 45.604,5.98 46.228,6.604 50.419,6.604 51.107,7.292 IC9.6@51.107,9.5
NetCN12_2: CN12.2 IC9.8 | length 10.8
  Top Layer w0.6: CN12.2@50.684,3.537 52.559,3.537 ; CN12.2@51.514,2.98 cw(c52.559,2.279) 52.559,3.537 ; CN12.2@51.514,4.094 ccw(c52.559,4.795) 52.559,3.537 ; IC9.8@53.647,9.5 53.647,4.625 52.559,3.537
NetCN13_1: CN13.1 IC10.6 | length 13.9
  Top Layer w0.6: CN13.1@63.132,4.501 ccw(c62.469,5.514) 63.68,5.514 ; CN13.1@63.68,3.664 63.68,5.514 ; CN13.1@64.228,4.501 cw(c64.891,5.514) 63.68,5.514 ; IC10.6@70.284,9.5 70.284,7.038 69.596,6.35 64.516,6.35 63.68,5.514
NetCN13_2: CN13.2 IC10.8 | length 13.2
  Top Layer w0.6: CN13.2@68.76,3.664 71.99,3.664 72.824,4.498 IC10.8@72.824,9.5 ; CN13.2@69.467,2.957 cw(c71.174,1.25) 71.174,3.664 cw(c71.174,6.078) CN13.2@69.467,4.371
NetCN14_1: CN14.1 IC11.6 | length 13
  Top Layer w0.6: CN14.1@27.013,4.395 ccw(c26.469,5.302) 27.527,5.302 ; CN14.1@27.527,3.537 27.527,5.302 ; CN14.1@28.041,4.395 cw(c28.585,5.302) 27.527,5.302 ; IC11.6@33.708,9.373 33.708,7.419 32.893,6.604 28.829,6.604 27.527,5.302
NetCN14_2: CN14.2 IC11.8 | length 12.6
  Top Layer w0.6: CN14.2@32.607,3.537 35.033,3.537 36.248,4.752 IC11.8@36.248,9.373 ; CN14.2@33.314,2.83 cw(c35.022,1.123) 35.022,3.537 cw(c35.022,5.951) CN14.2@33.314,4.244
NetCN15_1: CN15.1 L1.1 | length 24.8
  Top Layer w1: CN15.1@4.191,34.163 19.88,34.163 L1.1@20.134,33.909 ; CN15.1@4.757,33.597 cw(c6.122,32.232) 6.122,34.163 cw(c6.122,36.094) CN15.1@4.757,34.729 ; 15.899,34.163 cw(c15.899,29.674) L1.1@19.073,32.848 ; 17.126,34.163 ccw(c17.126,36.917) L1.1@19.073,34.97
NetIC3_A: IC3.A R5.1 | length 5.9
  Top Layer w0.25: IC3.A@48.905,83.67 cw(c48.009,82.774) 49.276,82.774 cw(c50.543,82.774) IC3.A@49.647,83.67 ; R5.1@49.082,82.379 ccw(c48.612,82.849) 49.276,82.849 ccw(c49.94,82.849) R5.1@49.47,82.379 ; IC3.A@49.082,83.847 cw(c48.612,83.377) 49.276,83.377 cw(c49.94,83.377) IC3.A@49.47,83.847 ; R5.1@49.276,82.185 IC3.A@49.276,84.041
NetIC5_A: IC5.A R6.1 | length 4.4
  Top Layer w0.4: IC5.A@26.985,67.719 R6.1@28.968,67.719 ; IC5.A@27.303,67.401 cw(c28.071,66.633) 28.071,67.719 cw(c28.071,68.805) IC5.A@27.303,68.037 ; R6.1@28.827,67.578 ccw(c28.485,67.236) 28.485,67.719 ccw(c28.485,68.202) R6.1@28.827,67.86
NetIC8_2: IC8.2 IC14.4 | length 10
  Top Layer w0.25: IC14.4@15.86,24.067 15.875,24.082 15.875,20.096 15.86,20.081 16.817,19.124 IC8.2@16.817,15.227 ; IC8.2@16.676,15.993 ccw(c16.334,16.335) 16.817,16.335 ccw(c17.3,16.335) IC8.2@16.958,15.993
NetIC8_3: IC8.3 IC12.4 | length 11.6
  Top Layer w0.25: IC12.4@12.939,24.067 12.939,20.081 13.462,19.558 14.986,19.558 15.547,18.997 IC8.3@15.547,15.227 ; IC8.3@15.406,15.993 ccw(c15.064,16.335) 15.547,16.335 ccw(c16.03,16.335) IC8.3@15.688,15.993
NetIC8_4: IC8.4 R8.2 | length 2.7
  Top Layer w0.4: R8.2@14.136,16.997 cw(c13.794,16.655) 14.277,16.655 cw(c14.76,16.655) R8.2@14.418,16.997 ; IC8.4@14.277,15.227 R8.2@14.277,17.138
NetIC9_2: IC9.2 IC15.4 | length 10.3
  Top Layer w0.25: IC15.4@51.293,24.194 51.293,20.462 52.377,19.378 IC9.2@52.377,15.1 ; IC9.2@52.236,15.866 ccw(c51.894,16.208) 52.377,16.208 ccw(c52.86,16.208) IC9.2@52.518,15.866
NetIC9_3: IC9.3 IC13.4 | length 12
  Top Layer w0.25: IC13.4@48.499,24.194 48.499,19.827 48.895,19.431 50.8,19.431 51.107,19.124 IC9.3@51.107,15.1 ; IC9.3@50.966,15.866 ccw(c50.624,16.208) 51.107,16.208 ccw(c51.59,16.208) IC9.3@51.248,15.866
NetIC9_4: IC9.4 R9.2 | length 2.5
  Top Layer w0.4: R9.2@49.696,16.743 cw(c49.354,16.401) 49.837,16.401 cw(c50.32,16.401) R9.2@49.978,16.743 ; IC9.4@49.837,15.1 R9.2@49.837,16.884
NetIC10_2: IC10.2 IC19.4 | length 10.8
  Top Layer w0.25: IC19.4@69.835,24.448 69.835,20.462 71.554,18.743 IC10.2@71.554,15.1 ; IC10.2@71.413,15.866 ccw(c71.071,16.208) 71.554,16.208 ccw(c72.037,16.208) IC10.2@71.695,15.866
NetIC10_3: IC10.3 IC17.4 | length 12.5
  Top Layer w0.25: IC17.4@66.914,24.448 66.914,20.208 67.691,19.431 69.342,19.431 70.284,18.489 IC10.3@70.284,15.1 ; IC10.3@70.143,15.866 ccw(c69.801,16.208) 70.284,16.208 ccw(c70.767,16.208) IC10.3@70.425,15.866
NetIC10_4: IC10.4 R10.2 | length 6.3
  Top Layer w0.4: R10.2@68.111,16.743 cw(c67.187,15.819) 68.493,15.819 ; R10.2@68.152,16.711 cw(c67.62,15.789) 68.648,16.064 ; R10.2@68.252,16.884 R10.2@68.493,16.643 ; 68.493,15.506 ccw(c68.936,15.506) IC10.4@68.786,15.09 ; 68.493,16.075 ccw(c69.139,16.075) IC10.4@68.921,15.466 ; IC10.4@69.014,15.1 68.493,15.621 R10.2@68.493,16.643 ; IC10.4@69.056,15.843 cw(c69.343,16.643) R10.2@68.493,16.643
NetIC11_2: IC11.2 IC18.4 | length 10.5
  Top Layer w0.25: IC18.4@33.767,24.194 33.767,20.335 34.978,19.124 IC11.2@34.978,14.973 ; IC11.2@34.837,15.739 ccw(c34.495,16.081) 34.978,16.081 ccw(c35.461,16.081) IC11.2@35.119,15.739
NetIC11_3: IC11.3 IC16.4 | length 12.1
  Top Layer w0.25: IC16.4@31.1,24.194 31.1,19.827 31.369,19.558 33.147,19.558 33.708,18.997 IC11.3@33.708,14.973 ; IC11.3@33.567,15.739 ccw(c33.225,16.081) 33.708,16.081 ccw(c34.191,16.081) IC11.3@33.849,15.739
NetIC11_4: IC11.4 R11.2 | length 2.7
  Top Layer w0.4: R11.2@32.297,16.743 cw(c31.955,16.401) 32.438,16.401 cw(c32.921,16.401) R11.2@32.579,16.743 ; IC11.4@32.438,14.973 R11.2@32.438,16.884
P5V: C9.1 C10.1 C11.1 PW1.3 R7.2 | length 65.1
  Top Layer w0.5: v5(25.019,85.09) 25.019,82.804 25.527,82.296 45.847,82.296 46.609,81.534 46.609,79.375 47.371,78.613 50.165,78.613 50.673,78.105 50.673,69.85 50.193,69.37 PW1.3@48.387,69.37 47.879,68.862 C10.1@44.834,68.862 ; C9.1@44.445,67.065 ccw(c43.506,68.004) 44.834,68.004 ccw(c46.162,68.004) C9.1@45.223,67.065 ; C11.1@44.586,70.407 cw(c43.987,69.808) 44.834,69.808 ; C10.1@44.624,68.521 cw(c44.116,68.013) 44.834,68.013 ; C10.1@44.624,69.203 ccw(c44.116,69.711) 44.834,69.711 ; C11.1@44.692,70.513 44.834,70.371 C10.1@44.834,68.862 ; C10.1@44.765,68.862 C10.1@44.834,68.862 ; C9.1@44.834,66.576 C10.1@44.834,68.862 ; C10.1@44.906,68.721 cw(c45.248,68.379) 45.248,68.862 cw(c45.248,69.345) C10.1@44.906,69.003 ; 45.591,68.862 ccw(c45.591,72.166) PW1.3@47.927,69.83 ; 46.798,68.862 ccw(c46.798,70.959) PW1.3@48.281,69.476 ; PW1.3@48.847,68.91 cw(c49.956,67.801) 49.956,69.37 cw(c49.956,70.939) PW1.3@48.847,69.83
  Bottom Layer w0.5: v2(20.943,85.09) v5(25.019,85.09)
P24V: C6.1 C7.1 C8.1 C12.1 C13.1 CE1.1 D1.1 D2.1 D3.1 D6.1 D7.1 IC4.1 PW1.1 R5.2 | length 166.7
  Top Layer w0.8: IC4.1@32.624,60.478 cw(c32.006,59.86) 32.88,59.86 cw(c33.754,59.86) IC4.1@33.136,60.478 ; IC4.1@33.898,60.478 cw(c34.516,59.86) 34.516,60.734 cw(c34.516,61.608) IC4.1@33.898,60.99 ; C13.1@35.699,62.258 35.699,60.807 C12.1@35.626,60.734 IC4.1@32.88,60.734 32.88,59.195 33.528,58.547 39.243,58.547 39.751,59.055 39.751,70.358 37.459,72.65 CE1.1@37.459,74.704 37.459,78.226 38.1,78.867 D3.1@43.688,78.867 ; CE1.1@36.858,74.103 cw(c35.407,72.652) 37.459,72.652 cw(c39.511,72.652) CE1.1@38.06,74.103 ; CE1.1@36.858,75.305 ccw(c35.407,76.756) 37.459,76.756 ccw(c39.511,76.756) CE1.1@38.06,75.305 ; 40.692,78.867 ccw(c40.692,81.662) D3.1@42.668,79.686 ; D3.1@42.884,78.867 ccw(c42.884,80.054) D3.1@43.723,79.215 ; D3.1@43.638,79.25 ccw(c44.442,79.25) D3.1@43.873,78.682 ; v2(43.688,79.25) D3.1@43.688,78.867 ; D3.1@43.836,78.814 cw(c41.771,76.749) C6.1@44.692,76.749 ; D3.1@44.073,78.667 cw(c43.776,77.801) 44.692,77.801 ; C6.1@44.361,76.655 ccw(c43.342,77.243) 44.478,77.547 ; C6.1@44.424,75.972 cw(c43.778,75.326) 44.692,75.326 ; C6.1@44.424,76.738 ccw(c43.778,77.384) 44.692,77.384 ; 44.555,77.26 ccw(c45.285,77.456) C6.1@44.907,76.801 ; C8.1@44.692,72.545 44.692,77.863 D3.1@43.688,78.867 ; 44.692,75.253 cw(c45.709,75.253) C6.1@44.99,75.972 ; 44.692,77.457 ccw(c45.709,77.457) C6.1@44.99,76.738 ; C7.1@44.765,74.196 48.133,74.196 PW1.1@48.387,74.45 ; 46.567,74.196 ccw(c46.567,76.27) PW1.1@48.033,74.804
  Bottom Layer w0.25: v2(43.688,79.25) 48.516,79.25 49.276,80.01 v2(49.276,80.137) ; v2@43.847,79.091 cw(c44.231,78.707) 44.231,79.25 cw(c44.231,79.793) v2@43.847,79.409 ; 48.802,79.536 ccw(c48.201,80.137) v2@49.051,80.137
  Bottom Layer w0.4: v5(10.541,46.99) 11.43,46.99 11.811,47.371 11.811,59.944 ; v5(10.541,59.817) 10.668,59.944 11.811,59.944 ; v5(10.541,72.644) 11.811,72.644 ; v5(10.541,85.344) 11.811,85.344 ; v5@10.682,46.849 cw(c11.024,46.507) 11.024,46.99 cw(c11.024,47.473) v5@10.682,47.131 ; v5@10.682,59.676 cw(c11.33,59.028) 11.33,59.944 ; v5@10.682,72.503 cw(c11.024,72.161) 11.024,72.644 cw(c11.024,73.127) v5@10.682,72.785 ; v5@10.682,85.203 cw(c11.024,84.861) 11.024,85.344 cw(c11.024,85.827) v5@10.682,85.485 ; 34.96,76.292 cw(c34.487,75.819) v2@35.156,75.819 ; v2@35.2,75.163 ccw(c34.944,75.419) 35.306,75.419 ccw(c35.668,75.419) v2@35.412,75.163 ; v2@35.2,75.713 cw(c34.944,75.457) 35.306,75.457 cw(c35.668,75.457) v2@35.412,75.713 ; v2(35.306,75.057) 35.306,75.946 34.036,77.216 34.036,87.249 33.02,88.265 12.192,88.265 11.811,87.884 11.811,85.344 ; 11.811,59.944 11.811,72.644 ; 11.811,72.644 11.811,85.344
  other v2: 35.306,75.819
SW_EXT_1: CN10.J4_10 IC1.12 | length 36.8
  Top Layer w0.25: CN10.J4_10@57.239,61.669 cw(c56.614,60.833) 57.658,60.833 ; CN10.J4_10@57.389,61.87 cw(c56.987,61.332) 57.658,61.332 cw(c58.329,61.332) CN10.J4_10@57.927,61.87 ; CN10.J4_10@57.658,62.23 57.658,60.833 ; CN10.J4_10@58.077,61.669 ccw(c58.702,60.833) 57.658,60.833 ; IC1.12@69.54,38.843 69.54,40.061 69.088,40.513 60.071,40.513 58.42,42.164 58.42,60.071 57.658,60.833
SW_EXT_2: CN10.J2_10 IC6.12 | length 23.2
  Top Layer w0.25: CN10.J2_10@59.703,61.735 cw(c58.508,60.54) 60.198,60.54 cw(c61.888,60.54) CN10.J2_10@60.693,61.735 ; CN10.J2_10@59.88,61.912 cw(c59.112,61.144) 60.198,61.144 cw(c61.284,61.144) CN10.J2_10@60.516,61.912 ; CN10.J2_10@60.198,62.23 60.198,54.483 60.96,53.721 69.215,53.721 69.54,53.396 IC6.12@69.54,52.051
SW_EXT_3: CN10.J1_8 IC2.12 | length 120.8
  Top Layer w0.25: v2@19.526,72.295 ccw(c19.142,72.679) 19.685,72.679 ccw(c20.228,72.679) v2@19.844,72.295 ; v2(19.685,72.136) 19.685,72.898 20.037,73.25 22.704,73.25 23.397,73.943 23.397,88.04 24.101,88.744 35.081,88.744 35.306,88.519 77.597,88.519 78.613,87.503 78.613,67.945 78.007,67.339 72.038,67.339 70.993,66.294 69.85,66.294 69.54,65.984 IC2.12@69.54,64.624
  Bottom Layer w0.25: CN10.J1_8@14.478,67.31 14.605,67.31 15.875,68.58 ; CN10.J1_8@14.482,67.76 ccw(c14.492,69.119) 15.453,68.158 ; CN10.J1_8@14.483,68.01 ccw(c14.499,69.956) 15.875,68.58 ; CN10.J1_8@14.928,67.31 cw(c15.708,67.31) 15.156,67.861 ; CN10.J1_8@15.178,67.31 cw(c16.561,67.31) 15.583,68.288 ; v2@19.526,71.977 cw(c19.142,71.593) 19.685,71.593 cw(c20.228,71.593) v2@19.844,71.977 ; v2(19.685,72.136) 19.685,69.088 19.177,68.58 15.875,68.58
SW_EXT_4: CN10.J4_8 IC7.12 | length 28.9
  Top Layer w0.25: CN10.J4_8@57.658,67.31 58.928,68.58 62.23,68.58 62.865,69.215 62.865,78.74 63.627,79.502 69.215,79.502 69.54,79.177 IC7.12@69.54,77.324 ; CN10.J4_8@57.658,67.76 ccw(c57.658,68.846) 58.426,68.078 ccw(c59.194,67.31) CN10.J4_8@58.108,67.31 ; CN10.J4_8@57.658,68.01 ccw(c57.658,69.7) 58.853,68.505 ccw(c60.048,67.31) CN10.J4_8@58.358,67.31
SW_RET_1: CN10.J4_9 IC1.9 | length 39.2
  Top Layer w0.25: CN10.J4_9@57.658,64.77 58.674,64.77 ; CN10.J4_9@58.312,64.521 cw(c58.674,64.383) 58.674,64.77 ; CN10.J4_9@58.312,65.019 ccw(c58.674,65.157) 58.674,64.77 ; IC1.9@71.49,38.843 71.49,40.27 70.739,41.021 60.452,41.021 58.928,42.545 58.928,64.516 58.674,64.77
SW_RET_2: CN10.J2_4 IC6.9 | length 41.7
  Top Layer w0.25: v2@64.262,77.245 cw(c64.262,76.702) 64.646,77.086 cw(c65.03,77.47) v2@64.487,77.47 ; v2(64.262,77.47) 64.77,76.962 64.77,54.991 65.532,54.229 70.866,54.229 71.49,53.605 IC6.9@71.49,52.051
  Bottom Layer w0.25: CN10.J2_4@60.198,77.47 v2(64.262,77.47) ; CN10.J2_4@60.516,77.152 cw(c61.284,76.384) 61.284,77.47 cw(c61.284,78.556) CN10.J2_4@60.516,77.788 ; CN10.J2_4@60.693,76.975 cw(c61.888,75.78) 61.888,77.47 cw(c61.888,79.16) CN10.J2_4@60.693,77.965 ; v2@64.103,77.311 ccw(c63.719,76.927) 63.719,77.47 ccw(c63.719,78.013) v2@64.103,77.629
SW_RET_3: CN10.J1_5 IC2.9 | length 114.3
  Top Layer w0.25: CN10.J1_5@14.478,74.23 cw(c14.478,72.847) 15.456,73.825 ; CN10.J1_5@14.478,74.48 cw(c14.478,73.7) 15.029,74.252 ; CN10.J1_5@14.478,74.93 14.478,74.803 15.621,73.66 ; CN10.J1_5@14.927,74.893 ccw(c16.002,74.805) 15.239,74.042 ; CN10.J1_5@15.176,74.873 ccw(c16.708,74.747) 15.621,73.66 ; IC2.9@71.49,64.624 71.49,65.902 72.517,66.929 78.359,66.929 79.121,67.691 79.121,88.011 78.117,89.015 35.635,89.015 35.496,89.154 23.749,89.154 22.987,88.392 22.987,74.295 22.352,73.66 15.621,73.66
SW_RET_4: CN10.J4_7 IC7.9 | length 29.3
  Top Layer w0.25: CN10.J4_7@57.658,69.85 58.928,71.12 61.976,71.12 62.357,71.501 62.357,79.121 63.246,80.01 71.12,80.01 71.49,79.64 IC7.9@71.49,77.324 ; CN10.J4_7@57.658,70.3 ccw(c57.658,71.386) 58.426,70.618 ccw(c59.194,69.85) CN10.J4_7@58.108,69.85 ; CN10.J4_7@57.658,70.55 ccw(c57.658,72.24) 58.853,71.045 ccw(c60.048,69.85) CN10.J4_7@58.358,69.85